# Altium PCB 电机驱动ASCII8833-3.PcbDoc
Units mil, origin at the board's own origin, x right, y up, seen from the top; angles counter-clockwise.
Board outline 747.9 x 1527.35 mil, 2 copper layers (Top Layer, Bottom Layer); 5 components, 35 nets, 43 pads, 11 vias.
Unrouted connection lines stored in the file: 3.
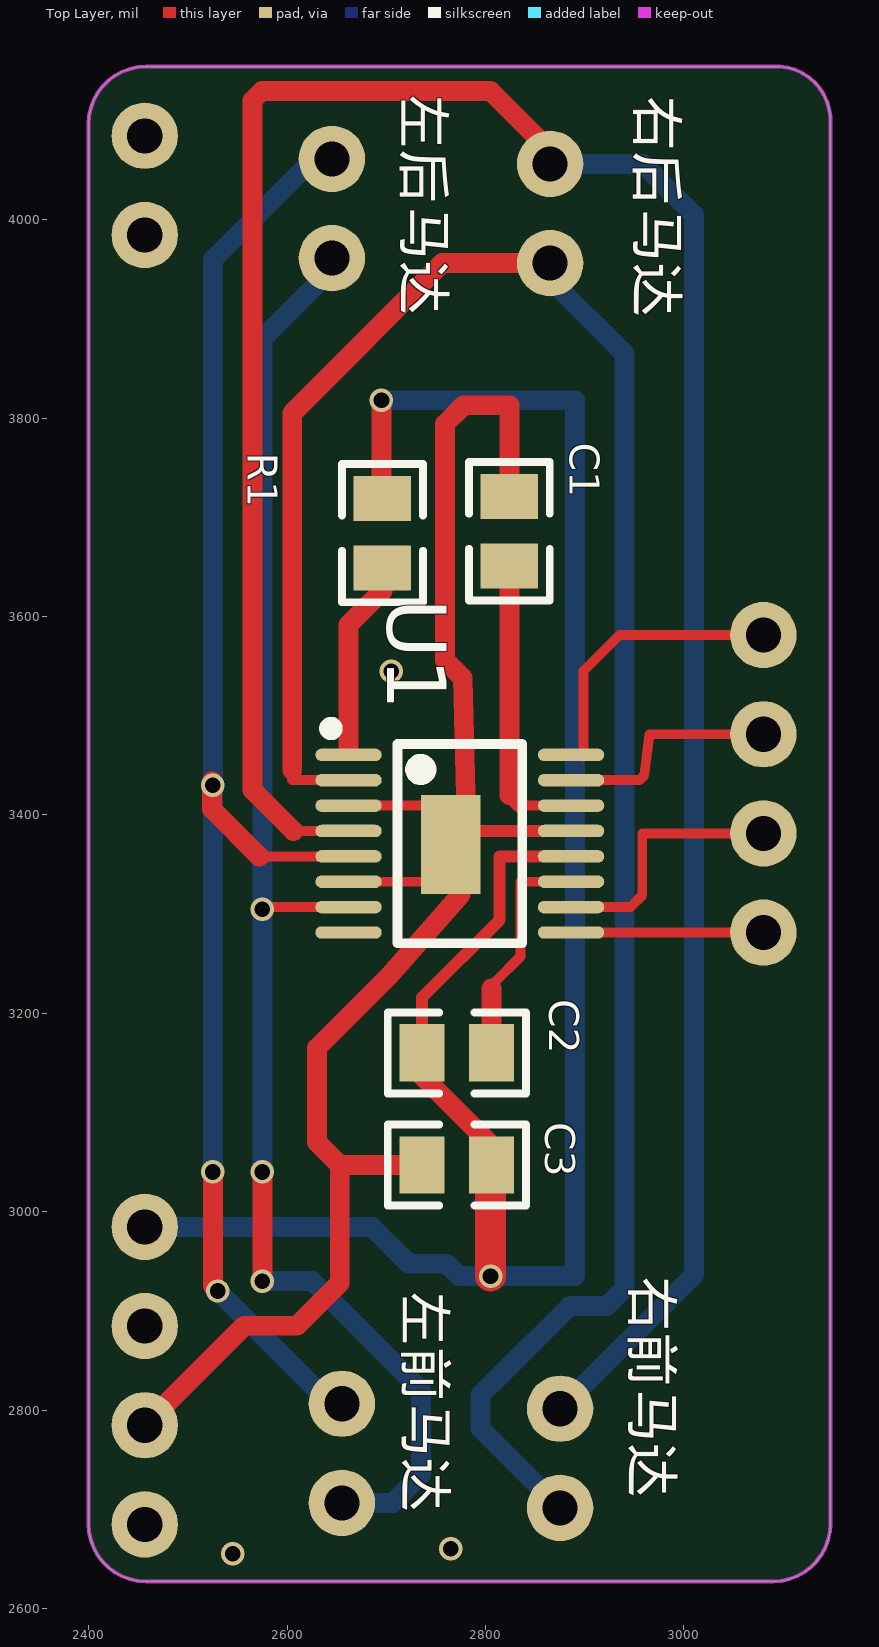
[diagram p0: Top Layer view]
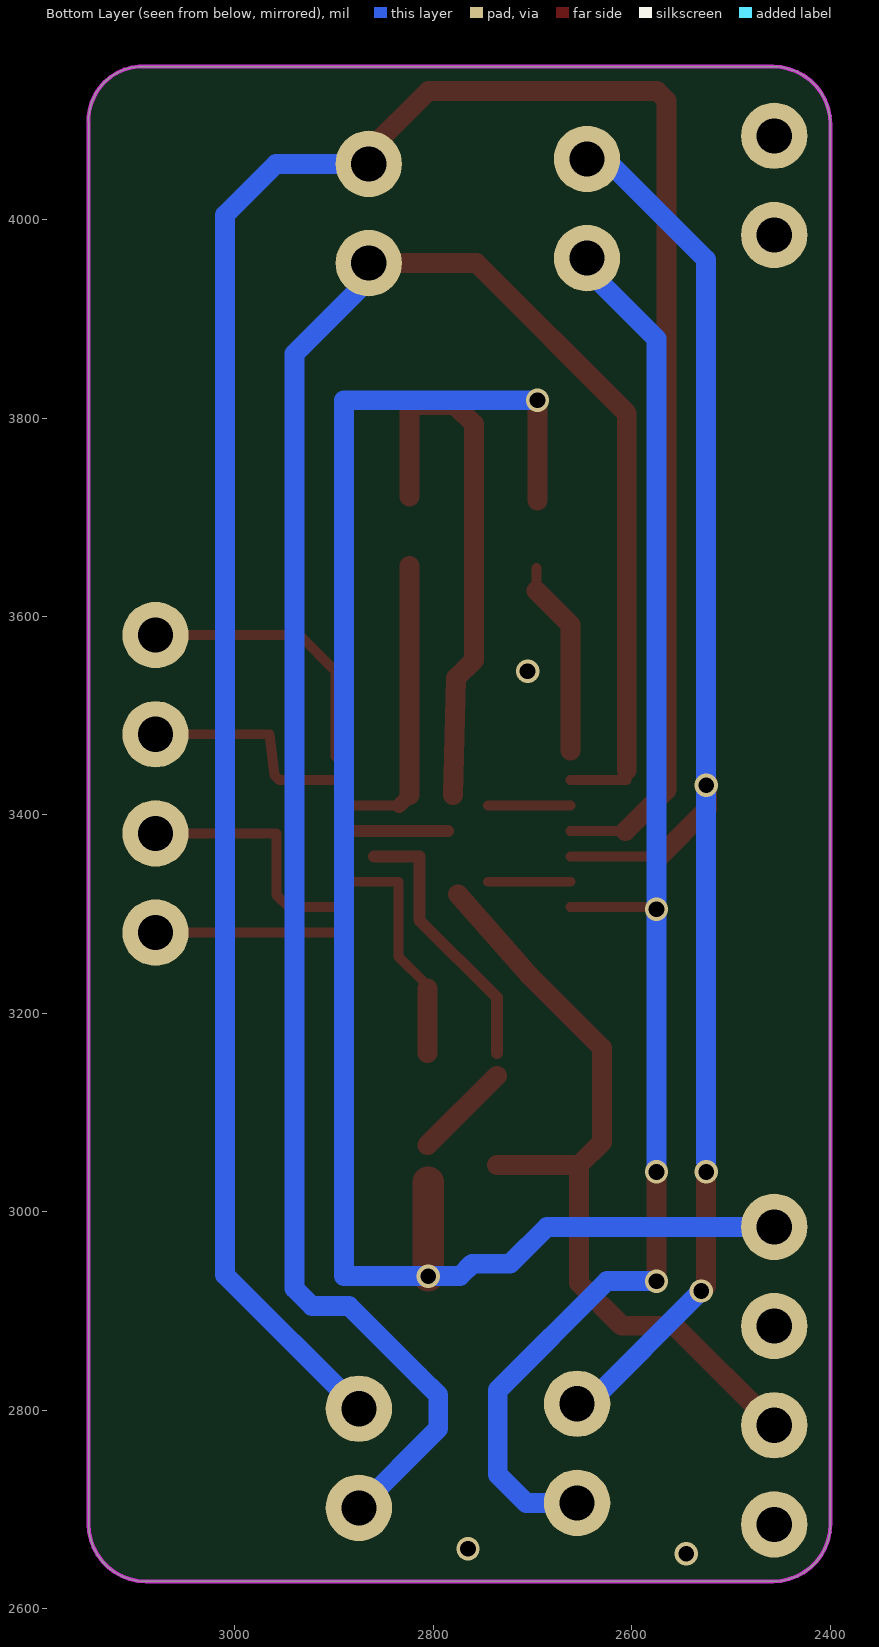
[diagram p1: Bottom Layer view, seen from below]

## Layer stack, top to bottom
Top Solder: solder mask 0.4, Solder Resist, Dk 3.5
Top Layer: signal copper 1.4
Dielectric1: dielectric 12.6, FR-4, Dk 4.8
Bottom Layer: signal copper 1.4
Bottom Solder: solder mask 0.4, Solder Resist, Dk 3.5

## Board outline
2399.7,2685.09 2399.7,4096.56 cw(c2457.64,4096.56) 2457.63,4154.5 3096.53,4154.5 cw(c3093.07,4099.97) 3147.6,4096.51 3147.6,2685.19 cw(c3089.66,2685.09) 3089.77,2627.15 2457.63,2627.15 cw(c2457.64,2685.09)

## Design rules (kind name [scope] priority, off if disabled: settings)
AssemblyTestPointUsage [All] p0: scope1count=1 scope1_0_kind=Board scope1_0_value=Board scope2count=1 scope2_0_kind=Board scope2_0_value=Board commentlength=0
AssemblyTestpoint [All] p0: scope1count=1 scope1_0_kind=Board scope1_0_value=Board scope2count=1 scope2_0_kind=Board scope2_0_value=Board commentlength=0
Clearance [All] p0: scope1count=1 scope1_0_kind=Board scope1_0_value=Board scope2count=1 scope2_0_kind=Board scope2_0_value=Board commentlength=0 gap=10
Clearance [All] p1: gap=10 ignorepadtopadclearanceinfootprint=FALSE except(0: Arc-Hole Track-Hole SMDPad-Hole THPad-Hole Via-Hole Fill-Hole Poly-Hole Region-Hole Text-Hole)
ComponentClearance [All] p0: scope1count=1 scope1_0_kind=Board scope1_0_value=Board scope2count=1 scope2_0_kind=Board scope2_0_value=Board commentlength=0 gap=10 collisioncheckmode=3
DiffPairsRouting [All] p0: scope1count=1 scope1_0_kind=Board scope1_0_value=Board scope2count=1 scope2_0_kind=Board scope2_0_value=Board commentlength=0
FabricationTestPointUsage [All] p0: scope1count=1 scope1_0_kind=Board scope1_0_value=Board scope2count=1 scope2_0_kind=Board scope2_0_value=Board commentlength=0 valid=0 allowmultiple=FALSE
FabricationTestpoint [All] p0: scope1count=1 scope1_0_kind=Board scope1_0_value=Board scope2count=1 scope2_0_kind=Board scope2_0_value=Board commentlength=0 side=3 testpointundercomponent=TRUE minsize=40 maxsize=100 preferedsize=60 minholesize=0 maxholesize=40 preferedholesize=32 testpointgrid=1
FanoutControl Fanout_Default [All] p0: scope1count=1 scope1_0_kind=Board scope1_0_value=Board scope2count=1 scope2_0_kind=Board scope2_0_value=Board commentlength=30 // Fanout_Default (Default Rule)
FanoutControl Fanout_Small [All] p0 off: scope1count=1 scope1_0_kind=Board scope1_0_value=Board scope2count=1 scope2_0_kind=Board scope2_0_value=Board commentlength=84 // Protel DXP Scope 1 Expression Was: (CompPinCount < 5)   Fanout_Small (Default Rule)
FanoutControl Fanout_SOIC [All] p0 off: scope1count=1 scope1_0_kind=Board scope1_0_value=Board scope2count=1 scope2_0_kind=Board scope2_0_value=Board commentlength=71 // Protel DXP Scope 1 Expression Was: IsSOIC   Fanout_SOIC (Default Rule)
FanoutControl Fanout_LCC [All] p0 off: scope1count=1 scope1_0_kind=Board scope1_0_value=Board scope2count=1 scope2_0_kind=Board scope2_0_value=Board commentlength=69 // Protel DXP Scope 1 Expression Was: IsLCC   Fanout_LCC (Default Rule)
FanoutControl Fanout_BGA [All] p0 off: scope1count=1 scope1_0_kind=Board scope1_0_value=Board scope2count=1 scope2_0_kind=Board scope2_0_value=Board commentlength=69 // Protel DXP Scope 1 Expression Was: IsBGA   Fanout_BGA (Default Rule)
Height [All] p0: scope1count=1 scope1_0_kind=Board scope1_0_value=Board scope2count=1 scope2_0_kind=Board scope2_0_value=Board commentlength=0
HoleSize [All] p0: scope1count=1 scope1_0_kind=Board scope1_0_value=Board scope2count=1 scope2_0_kind=Board scope2_0_value=Board commentlength=0 absolutevalues=TRUE maxlimit=100 minlimit=1 maxpercent=80.000 minpercent=20.000
HoleToHoleClearance [All] p0: scope1count=1 scope1_0_kind=Board scope1_0_value=Board scope2count=1 scope2_0_kind=Board scope2_0_value=Board commentlength=0
LayerPairs [All] p0: scope1count=1 scope1_0_kind=Board scope1_0_value=Board scope2count=1 scope2_0_kind=Board scope2_0_value=Board commentlength=0 enforce=TRUE
MinimumSolderMaskSliver [All] p0: scope1count=1 scope1_0_kind=Board scope1_0_value=Board scope2count=1 scope2_0_kind=Board scope2_0_value=Board commentlength=0
NetAntennae [All] p0: scope1count=1 scope1_0_kind=Board scope1_0_value=Board scope2count=1 scope2_0_kind=Board scope2_0_value=Board commentlength=0
PasteMaskExpansion [All] p0: scope1count=1 scope1_0_kind=Board scope1_0_value=Board scope2count=1 scope2_0_kind=Board scope2_0_value=Board commentlength=0 expansion=0
PlaneClearance [All] p0: scope1count=1 scope1_0_kind=Board scope1_0_value=Board scope2count=1 scope2_0_kind=Board scope2_0_value=Board commentlength=0 clearance=20
PlaneConnect [All] p0: scope1count=1 scope1_0_kind=Board scope1_0_value=Board scope2count=1 scope2_0_kind=Board scope2_0_value=Board commentlength=0 planeconnectstyle=Relief reliefexpansion=20 reliefentries=4 reliefconductorwidth=10 reliefairgap=10
PolygonConnect [All] p0: scope1count=1 scope1_0_kind=Board scope1_0_value=Board scope2count=1 scope2_0_kind=Board scope2_0_value=Board commentlength=0 connectstyle=Relief reliefconductorwidth=10 reliefentries=4 polygonreliefangle="90 Angle"
PolygonConnect [All] p1: connectstyle=Relief reliefconductorwidth=10 reliefentries=4 polygonreliefangle="90 Angle" airgapwidth=10
RoutingCorners [All] p0: scope1count=1 scope1_0_kind=Board scope1_0_value=Board scope2count=1 scope2_0_kind=Board scope2_0_value=Board commentlength=0 cornerstyle=45-Degree minsetback=100 maxsetback=100
RoutingLayers [All] p0: scope1count=1 scope1_0_kind=Board scope1_0_value=Board scope2count=1 scope2_0_kind=Board scope2_0_value=Board commentlength=0 top layer=Automatic bottom layer=Automatic
RoutingPriority [All] p0: scope1count=1 scope1_0_kind=Board scope1_0_value=Board scope2count=1 scope2_0_kind=Board scope2_0_value=Board commentlength=0
RoutingTopology [All] p0: scope1count=1 scope1_0_kind=Board scope1_0_value=Board scope2count=1 scope2_0_kind=Board scope2_0_value=Board commentlength=0 topology=Shortest
RoutingVias [All] p0: scope1count=1 scope1_0_kind=Board scope1_0_value=Board scope2count=1 scope2_0_kind=Board scope2_0_value=Board commentlength=0 holewidth=28 width=50 viastyle="Through Hole" minholewidth=28 minwidth=50 maxholewidth=28 maxwidth=50
RoutingVias [All] p1: holewidth=28 width=50 viastyle="Through Hole" minholewidth=28 minwidth=50 maxholewidth=28 maxwidth=50
ShortCircuit [All] p0: scope1count=1 scope1_0_kind=Board scope1_0_value=Board scope2count=1 scope2_0_kind=Board scope2_0_value=Board commentlength=0 allowed=FALSE
SilkToBoardRegionClearance [All] p0: scope1count=1 scope1_0_kind=Board scope1_0_value=Board scope2count=1 scope2_0_kind=Board scope2_0_value=Board commentlength=0
SilkToSilkClearance [All] p0: scope1count=1 scope1_0_kind=Board scope1_0_value=Board scope2count=1 scope2_0_kind=Board scope2_0_value=Board commentlength=0
SilkToSolderMaskClearance SilkscreenOverComponentPads [All] p0 off: scope1count=1 scope1_0_kind=Board scope1_0_value=Board scope2count=1 scope2_0_kind=Board scope2_0_value=Board commentlength=44 // Protel DXP Scope 1 Expression Was: IsPad
SilkToSolderMaskClearance SilkscreenOverComponentPads [IsPad] p1: minsilkscreentomaskgap=10 clearancetoexposedcopper=TRUE
SolderMaskExpansion [All] p0: scope1count=1 scope1_0_kind=Board scope1_0_value=Board scope2count=1 scope2_0_kind=Board scope2_0_value=Board commentlength=0 expansion=4
SolderMaskExpansion [All] p1: expansion=4
UnRoutedNet [All] p0: scope1count=1 scope1_0_kind=Board scope1_0_value=Board scope2count=1 scope2_0_kind=Board scope2_0_value=Board commentlength=0
UnpouredPolygon [All] p0: scope1count=1 scope1_0_kind=Board scope1_0_value=Board scope2count=1 scope2_0_kind=Board scope2_0_value=Board commentlength=0
Width [All] p0: scope1count=1 scope1_0_kind=Board scope1_0_value=Board scope2count=1 scope2_0_kind=Board scope2_0_value=Board commentlength=0 maxlimit=50 minlimit=10 preferedwidth=20
Width [All] p1: maxlimit=50 minlimit=10 preferedwidth=20
29 further rules are at their usual default settings.

## Components (designator, comment, footprint, x,y, rotation, side; value= is the part's Value field where it differs from the comment)
C1 "2.2UF" 0805_R 2824,3686 r270 top
C2 "10NF" 0805_R 2771,3160 r0 top
C3 "" 0805_R 2771,3047 r0 top
R1 "47K" 0805_R 2696,3684 r270 top
U1 "DRV8833" TSSOP-16 2774,3371 r270 top

## Footprints (in the part's own frame and the unit in brackets; to place one, negate y for a bottom-side part, rotate by r counter-clockwise, add the part's x,y. Pads: shape width x height; smd on the part's side, far side on the other; paste and mask are expansions set on the pad)
0805_R [mm]
  rect 1.16x1.47 smd: 1(-0.89,0) 2(0.89,0)
  silkscreen extent -1.77,-1.04 1.77,1.03
TSSOP-16 [mm]
  oval 0.32x1.7 smd: 1(-2.275,-2.85) 2(-1.625,-2.85) 3(-0.975,-2.85) 4(-0.325,-2.85) 5(0.325,-2.85) 6(0.975,-2.85) 7(1.625,-2.85) 8(2.275,-2.85) 9(2.275,2.85) 10(1.625,2.85) 11(0.975,2.85) 12(0.325,2.85) 13(-0.325,2.85) 14(-0.975,2.85) 15(-1.625,2.85) 16(-2.275,2.85)
  silkscreen extent -3.1,-3.45 2.55,1.6

## Free pads (board coordinates)
  round 66.93 hole 35.43: 0(2456.33,2684.65) 0(2456.33,2784.65) 0(2456.33,2884.65) 0(2456.33,2984.65) 0(2456.33,3984.65) 0(2456.33,4084.65) 0(2645.08,3961.33) 0(2645.08,4061.33) 0(2655.08,2706.33) 0(2655.08,2806.33) 0(2865.08,3956.33) 0(2865.08,4056.33) 0(2875.08,2701.33) 0(2875.08,2801.33) 0(3080.08,3281.33) 0(3080.08,3381.33) 0(3080.08,3481.33) 0(3080.08,3581.33)
  rect 60x100 smd: 1(2765,3370)

## Via types
v1: diameter 23.62, hole 15.75, Top Layer to Bottom Layer, 11 vias

## Nets (pads, with @x,y where several pads share a name; then routed paths per layer and width w, separated by ;. In a path a pad name is that pad's centre, name@x,y a point inside that pad or via, vN(x,y) a via of type N, cw(c..) or ccw(c..) an arc to the next point about the centre after c; other vN are vias at no path point)
$Net1: 
$Net2: 
$Net3: 
$Net4: 
$Net5: 
$Net6: 
$Net7: 
$Net8: 
$Net9: 
$Net10: 
$Net11: 
$Net12: 
$Net13: 
$Net14: 
$Net15: 
$Net16: 
$Net17: 
$Net18: 
$Net19: 
$Net20: 
$Net21: 
$Net22: 
$Net23: 
$Net24: 
$Net25: 
$Net26: 
$Net27: 
$Net28: 
$Net29: 
$Net30: 
$Net31: 
$Net32: 
$Net33: 
GND: C1.1 C3.1 pad.0@2456.33,2784.65 pad.1 U1.3 U1.6 U1.13 | length 1611.8
  Top Layer w10: U1.6 pad.1@2745,3332.61 ; U1.3 pad.1@2745,3409.39
  Top Layer w12: pad.1@2785,3383.8 U1.13
  Top Layer w20: pad.0@2456.33,2784.65 2556.68,2885 2610,2885 2653,2928 2653,3047 ; C3.1 2653,3047 ; pad.1@2775,3320 2703,3238 2630,3165 2630,3070 2653,3047 ; 2780,3420 2777,3538 2759,3556 2759,3794 2778,3813 2824,3813 C1.1
  other v1: 2545,2655 2765,2660 2705,3545
VCC: C2.1 C3.2 pad.0@2456.33,2984.65 R1.1 U1.12 | length 2103.8
  Top Layer w12: C2.1 2735.96,3215.96 2814,3294 2814,3358.2 U1.12@2860,3358.2
  Top Layer w20: R1.1@2695,3717.04 v1(2695,3818) ; C2.1@2735.96,3137.04 C3.2@2806.04,3066.96
  Top Layer w31.5: v1(2805,2935) C3.2@2805,3030
  Bottom Layer w20: pad.0@2456.33,2984.65 2685.35,2984.65 2722.59,2947.41 2760.78,2947.41 2773.19,2935 v1(2805,2935) 2890,2935 2890,3818 v1(2695,3818)
pads on no net: C1.2 C2.2 R1.2 U1.1 U1.2 U1.4 U1.5 U1.7 U1.8 U1.9 U1.10 U1.11 U1.14 U1.15 U1.16
copper on no net: | length 9558.4
  Top Layer w10: 2571.8,3358.2 2661.8,3358.2 ; v1@2575,3307.02 2661.8,3307.02 ; 2605,3444.95 2605,3434.98 2661.8,3434.98 ; 2606.2,3383.8 2661.8,3383.8 ; 2696,3625.96 2696,3648.96 ; 2809,3231 2835,3257 2835,3332.61 2886.2,3332.61 ; 2834.61,3409.39 2886.2,3409.39 ; 2886.2,3307.02 2945.98,3307.02 2957.95,3319 2957.95,3381.08 3080.08,3381.08 ; 2886.2,3434.98 2955.02,3434.98 2960,3439.95 2965.28,3481.33 3080.08,3481.33 3066.88,3468.12 3053.67,3481.33 ; 2897.31,3281.33 3080.08,3281.33 ; 2898.83,3459 2898.83,3545.16 2935,3581.33 3080.08,3581.33 ; 3059.78,3360.78 3072.78,3360.78
  Top Layer w15: 2824,3420 2834.61,3409.39
  Top Layer w20: v1@2524,3434 2524,3406 2571.8,3358.2 ; v1@2525,2925 v1(2525,3040) ; v1(2575,2930) v1(2575,3040) ; 2605,3444.95 2605,3805 2756.33,3956.33 2865.08,3956.33 ; 2606.2,3383.8 2565,3425 2565,4120.42 2574.58,4130 2805,4130 2865.08,4069.92 2865.08,4056.33 2865.08,4055.08 ; 2661.8,3465 2661.8,3591.76 2696,3625.96 ; 2806.04,3160 2806.04,3225 ; 2824,3420 2824,3650.96
  Bottom Layer w10: 3084.24,3275.07 3085.89,3275.06 3092.48,3274.72 3099.04,3273.91 3105.52,3272.65
  Bottom Layer w20: v1@2525,3050 2525,3960 2626.33,4061.33 2645.08,4061.33 ; v1(2530,2920) 2643.67,2806.33 2655.08,2806.33 ; v1(2575,2930) 2625,2930 2735,2820 2735,2735 2706.33,2706.33 2655.08,2706.33 ; v1(2575,3040) 2575,3880 2645.08,3950.08 2645.08,3961.33 ; 2865.08,3956.33 2865.08,3939.92 2940,3865 2940,2922.57 2922.43,2905 2885,2905 2814.3,2834.3 2795,2815 2795,2781.41 2875.08,2701.33 ; 2865.08,4056.33 2958.67,4056.33 3010,4005 3010,2936.25 2875.08,2801.33
  other v1: 2575,3305 2525,3430

## Keep-outs
Keep-Out Layer:
  the board outline again, w4

## Silkscreen, mask and mechanical layers (free items; w line width, h text height)
Top Overlay:
  text "左后马达" at 2705,4127.21 h70 r270
  text "右后马达" at 2940,4125 h70 r270
  text "右前马达" at 2935,2935 h70 r270
  text "左前马达" at 2706.33,2920 h70 r270

## Text inside footprints (layer, text, board x,y; h text height)
C3: Mechanical 13 "10NF" at -2067.58,5822.59 h60 r270